# Altium PCB final_board.PcbDoc (part 2 of 2)
Units mm, origin at the board's own origin, x right, y up, seen from the top; angles counter-clockwise.
Board outline 39.12 x 41.3 mm, 2 copper layers (Top Layer, Bottom Layer); 55 components, 47 nets, 226 pads, 45 vias.
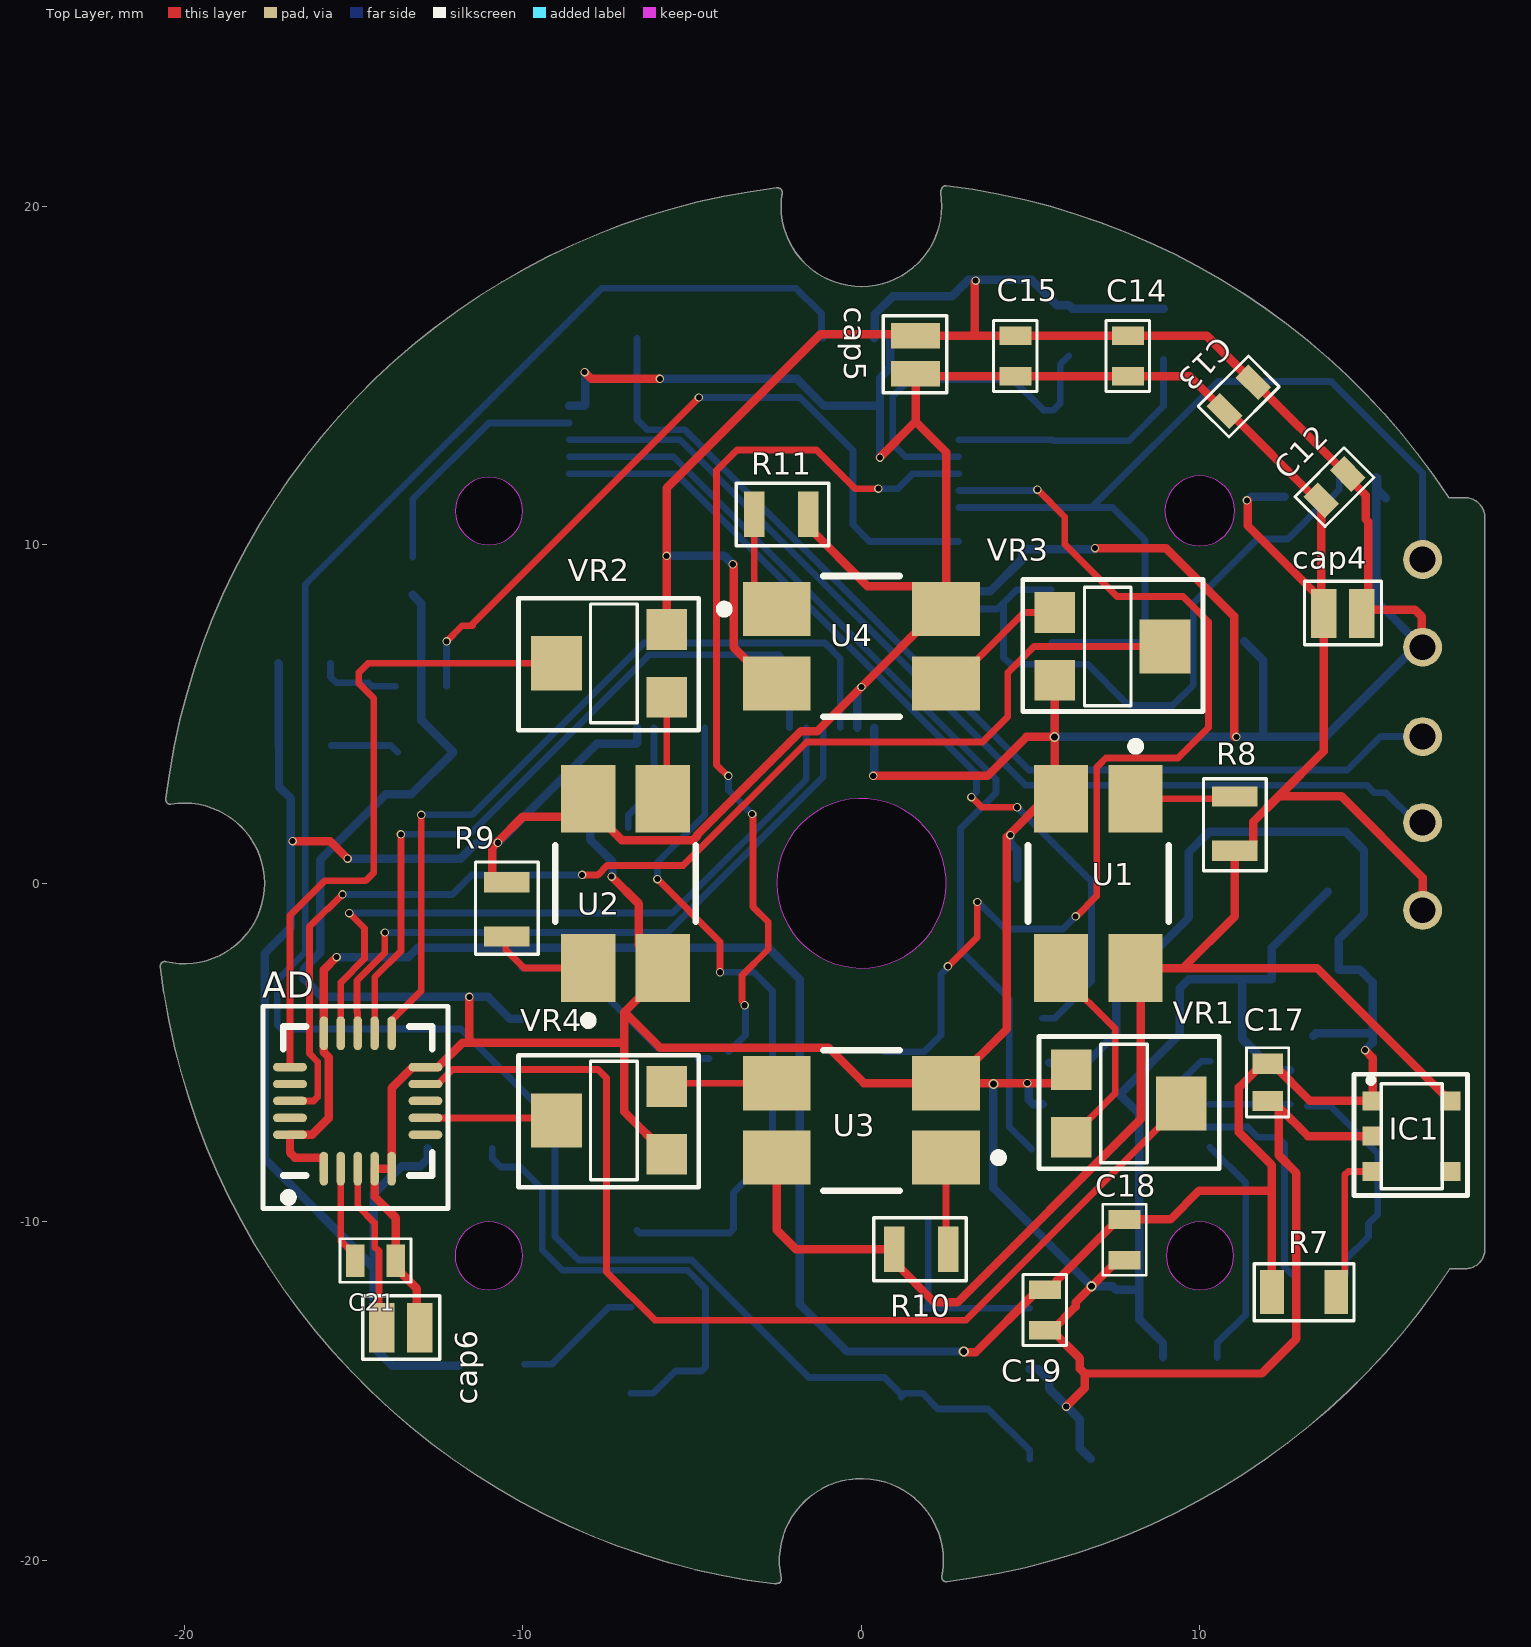
[diagram p0: Top Layer view]

## Via types
v1: diameter 0.25, hole 0.18, Top Layer to Bottom Layer, 41 vias
v2: diameter 0.3, hole 0.2, Top Layer to Bottom Layer, 4 vias

## Nets (pads, with @x,y where several pads share a name; then routed paths per layer and width w, separated by ;. In a path a pad name is that pad's centre, name@x,y a point inside that pad or via, vN(x,y) a via of type N, cw(c..) or ccw(c..) an arc to the next point about the centre after c; other vN are vias at no path point) (continued)
NetC7_2: (continued)
  Bottom Layer w0.2: stm.13 3.125,8.1 3.175,8.15 3.225,8.1 4.025,8.1 4.2,8.275 ; C7.2 4.6,8.675 4.2,8.275 ; cap1.1@14.113,11.975 14.113,11.625 13.838,11.35 13.771,11.35 12.596,10.175 L1.2 11.697,10.175 9.805,8.283 9.805,5.863 9.192,5.25 7.946,5.25 7.896,5.3 7.85,5.3 6.675,6.475 4.4,6.475 4.2,6.675 4.2,8.275
Netc10-3_1: cap3.1 stm.47 | length 7.3
  Bottom Layer w0.2: cap3.1@-13.25,9.637 -13.25,11.35 -11,13.6 stm.47
Netc-10-2_2: cap2.2 stm.31 | length 3.3
  Bottom Layer w0.2: cap2.2 -6.887,2 -6.145,2.742 -6.145,2.875 -6.125,2.895 stm.31
NetC_1: C.1 CR1.4 stm.4 | length 10.6
  Bottom Layer w0.2: stm.4 1.3,12.6 0.925,12.975 0.925,14.375 1.425,14.875 4.475,14.875 5.375,13.975 5.675,13.975 5.871,14.171 5.871,15.321 C.1
NetIC1_3: IC1.3 R7.2 | length 4.4
  Top Layer w0.2: R7.2 14.275,-11.812 14.275,-8.612 14.381,-8.506 IC1.3
NetLED1_1: LED1.1 R1.2 | length 2.4
  Bottom Layer w0.2: R1.2 -15.675,6.1 -15.5,5.925 -14.55,5.925 -14.45,5.825 LED1.1
NetLED2_1: LED2.1 R6.2 | length 2
  Bottom Layer w0.2: R6.2 -13.9,4.075 LED2.1
NetMC*_8: MC*.8 RS.1 | length 7
  Bottom Layer w0.2: MC*.8 11.354,-8.849 11.354,-12.729 10.508,-13.575 RS.1
NetR2_2: R2.2 S1.1 S1.2 | length 5.7
  Bottom Layer w0.2: S1.2@1.8,-12.515 1.835,-12.55 1.975,-12.55 R2.2 ; S1.2@1.975,-12.49 S1.1@1.975,-9.95
NetR3_1: R3.1 S1.5 | length 3.8
  Bottom Layer w0.2: R3.1 -9.14,-14.2 -7.455,-12.515 S1.5@-6.8,-12.515
NetR4_1: R4.1 S1.4 | length 14.1
  Bottom Layer w0.2: R4.1 -10.9,-8.125 -10.65,-8.375 -10.075,-8.375 -9.425,-9.025 -9.425,-10.825 -8.825,-11.425 -5.137,-11.425 -4.6,-11.962 -4.6,-14.283 -4.717,-14.4 -5.49,-14.4 -6.145,-15.055 S1.4@-6.8,-15.055
NetR8_2: R8.2 U1.A | length 3
  Top Layer w0.2: U1.A 10.962,2.5 R8.2
NetR9_2: R9.2 U2.A | length 3.3
  Top Layer w0.2: R9.2@-10.902,-1.567 -10.702,-1.567 -10.502,-1.767 -10.502,-1.967 -9.969,-2.5 U2.A@-8.1,-2.5
NetR10_2: R10.2 U3.A | length 2.7
  Top Layer w0.2: U3.A 2.5,-10.737 R10.2
NetR11_2: R11.2 U4.A | length 3.3
  Top Layer w0.2: R11.2 -3.167,8.767 U4.A U4.A@-2.367,8.233
NetU1_E: U1.E VR1.3 | length 6.2
  Top Layer w0.2: U1.E 5.9,-2.7 7.5,-4.3 7.5,-6.194 VR1.3
NetU2_E: U2.E VR2.1 | length 3.1
  Top Layer w0.2: U2.E@-5.9,2.5 -5.75,2.65 VR2.1
NetU3_E: U3.E VR4.3 | length 3.3
  Top Layer w0.2: VR4.3 -5.65,-5.9 U3.E
NetU4_E: U4.E VR3.1 | length 4.1
  Top Layer w0.2: U4.E 2.7,5.9 4.8,8 VR3.1
NRST: C1.2 H1.5 stm.7 sw1.3 | length 26.6
  Bottom Layer w0.2: stm.7 6.8,11.1 ; C1.2 8.275,7.125 sw1.3 8.375,7.225 8.375,10.142 7.417,11.1 6.8,11.1 ; H1.5 16.575,12.125 13.875,14.825 10.525,14.825 6.8,11.1
NSS: AD.11 stm.20 | length 23.5
  Top Layer w0.2: AD.11 -13.875,-4.05 -13,-3.175 v1(-13,2.025)
  Bottom Layer w0.2: v1(-13,2.025) -11.5,2.025 -6.425,7.1 -1.075,7.1 -0.625,6.65 stm.20
PB2: S1.6 stm.28 | length 20.8
  Top Layer w0.2: v1(-6.025,0.125) -4.175,-1.725 v1(-4.175,-2.625)
  Bottom Layer w0.2: S1.6@-6.625,-10.249 -6.549,-10.325 -3.892,-10.325 -3.775,-10.208 -3.775,-9.125 -2.625,-7.975 -2.625,-3.175 -3.175,-2.625 v1(-4.175,-2.625) ; v1(-6.025,0.125) -6.025,0.625 -4.625,2.025 stm.28
PC1: LED1.2 stm.9 | length 22.5
  Top Layer w0.2: v1(-12.25,7.15) -11.787,7.613 -11.487,7.613 -11.487,7.662 v1(-4.8,14.35)
  Bottom Layer w0.2: LED1.2 -12.25,7.125 v1@-12.225,7.15 ; v1@-4.775,14.35 -1.81,14.35 -0.25,12.79 -0.25,10.592 0.242,10.1 stm.9
PC13: stm.2
SCK: AD.13 stm.21 | length 19.6
  Top Layer w0.2: AD.13 -14.885,-4.415 -14.885,-3.815 -14.9,-3.8 -14.9,-2.872 -14.075,-2.047 v1(-14.075,-1.45)
  Bottom Layer w0.2: v1(-14.075,-1.45) -5.726,-1.45 -1.125,3.151 stm.21
SWCLK: H1.3 stm.49 | length 30.3
  Bottom Layer w0.2: stm.49 -6.625,13.7 -6.325,13.4 -5.226,13.4 2.199,5.975 2.321,5.975 4.946,3.35 14.35,3.35 15.335,4.335 H1.3
SWDIO: H1.2 stm.46 | length 29.6
  Bottom Layer w0.2: stm.46 -5.35,13.1 4.85,2.9 14.925,2.9 15.15,2.675 15.5,2.675 H1.2@16.35,1.825
VBAT: stm.1
pads on no net: AD.6 AD.8 AD.17 AD.19 CR1.2 CR1.3 IC1.4 MC*.5 stm.8 stm.10 stm.11 stm.14 stm.15 stm.16 stm.17 stm.24 stm.25 stm.26 stm.27 stm.29 stm.30 stm.33 stm.34 stm.35 stm.36 stm.37 stm.38 stm.39 stm.40 stm.41 stm.42 stm.43 stm.50 stm.51 stm.52 stm.53 stm.54 stm.55 stm.56 stm.57 stm.58 stm.59 stm.61 stm.62 sw1.2 sw1.4 sw2.S1 sw2.S2

## Polygon pours and split planes (outlines as drawn)
GND on Bottom Layer "Bottom Layer-GND 1" (solid, remove dead copper, pour order 248): 1.932,21.641 -1.473,21.641 ccw(c-1.473,2.032) -21.082,2.032 -21.082,-1.905 ccw(c-1.626,-1.905) -1.626,-21.361 3.434,-21.361 ccw(c3.434,-4.425) 20.371,-4.425 21.458,-4.425 ccw(c21.458,3.505) 29.388,3.505 29.388,7.899 ccw(c23.495,7.899) 23.495,13.792 ccw(c15.723,13.792) 15.723,21.565 1.626,21.565
no net on Bottom Layer "Bottom Layer-No Net 12" (solid, remove dead copper, pour order 264): 25.146,16.05
GND on Bottom Layer "Bottom Layer-GND" (solid, remove dead copper, pour order 250): 0.483,19.812
no net on Bottom Layer "Bottom Layer-No Net 11" (solid, remove dead copper, pour order 244): -7.442,22.25
no net on Bottom Layer "Bottom Layer-No Net 9" (solid, remove dead copper, pour order 232): -16.967,26.822
no net on Bottom Layer "Bottom Layer-No Net 10" (solid, pour order 216): 29.413,14.478
no net on Bottom Layer "Bottom Layer-No Net 7" (solid, pour order 194): -22.225,16.65
no net on Bottom Layer "Bottom Layer-No Net 8" (solid, pour order 104): -22.375,16.575
no net on Bottom Layer "Bottom Layer-No Net 4" (solid, pour order 102): -17.7,17.725
no net on Bottom Layer "Bottom Layer-No Net 5" (solid, pour order 100): -17.4,18.025
no net on Bottom Layer "Bottom Layer-No Net 6" (solid, pour order 92): -18.6,18.325
no net on Bottom Layer "Bottom Layer-No Net 3" (solid, pour order 90): -19.975,15.45
no net on Bottom Layer "Bottom Layer-No Net 1" (solid, pour order 88): -20.2,18.925
no net on Bottom Layer "Bottom Layer-No Net 2" (solid, pour order 68): -15.5,29.4
no net on Bottom Layer "Bottom Layer-No Net" (solid, pour order 62): -19.725,27.5
no net on Top Layer "Top Layer-No Net 9" (solid, pour order 198): -29.667,18.212
GND on Top Layer "Top Layer-GND" (solid, pour order 192): -0.2,20.6
GND on Top Layer "Top Layer-GND 1" (solid, pour order 190): -0.675,19.9
GND on Top Layer "Top Layer-GND 2" (solid, pour order 188): -27.2,19.125
GND on Top Layer "Top Layer-GND 3" (solid, pour order 182): -16.55,24.625
GND on Top Layer "Top Layer-GND 4" (solid, pour order 180): -2.625,20.45
GND on Top Layer "Top Layer-GND 5" (solid, pour order 176): -3.15,18.825
GND on Top Layer "Top Layer-GND 6" (solid, pour order 174): -3.15,18.825
GND on Top Layer "Top Layer-GND 7" (solid, pour order 168): 0.01,20.05
GND on Top Layer "Top Layer-GND 8" (solid, pour order 166): -26.775,10.575
GND on Top Layer "Top Layer-GND 9" (solid, pour order 156): -11.075,19.9
GND on Top Layer "Top Layer-GND 10" (solid, pour order 140): 47.45,12.2 47.575,12.2 cw(c47.575,12.1) 47.675,12.1
GND on Top Layer "Top Layer-GND 11" (solid, pour order 138): 47,11.275
GND on Top Layer "Top Layer-GND 12" (solid, pour order 134): -5.75,9.675
no net on Top Layer "Top Layer-No Net 6" (solid, pour order 96): -21.55,22.9
no net on Top Layer "Top Layer-No Net 3" (solid, pour order 84): -19.175,19.3
no net on Top Layer "Top Layer-No Net 4" (solid, pour order 82): -18.825,19.6
no net on Top Layer "Top Layer-No Net 5" (solid, pour order 80): -18.825,19.6
no net on Top Layer "Top Layer-No Net 7" (solid, pour order 76): -13.425,19.925
no net on Top Layer "Top Layer-No Net 8" (solid, pour order 74): -13.425,19.925
no net on Top Layer "Top Layer-No Net" (solid, pour order 28): -18.625,20.45
no net on Top Layer "Top Layer-No Net 1" (solid, pour order 24): -20.825,23.975
no net on Top Layer "Top Layer-No Net 2" (solid, pour order 20): -19.625,17.9

## Other copper
Top Layer:
  pour cut-out: -22.9,24.2

## Silkscreen, mask and mechanical layers (free items; w line width, h text height)
Bottom Overlay:
  text "NRST" at 15.443,9.425 h0.45
  text "GND" at 15.392,6.68 h0.45
  text "SWCLK" at 15.545,4.064 h0.45
  text "SWDIO" at 15.494,1.575 h0.45
  text "3.3V" at 15.469,-1.346 h0.45
Mechanical 1:
  circle w0.254: c9.997,11 r1.032
  circle w0.254: c10,-11 r1
  circle w0.254: c-11,-11 r1
  circle w0.254: c-11,10.997 r0.997
  lines w0.254: -20.578,-2.447 ccw(c0,0) -2.562,-20.564 ; -20.575,-2.433 ccw(c-20,0) -20.413,2.466 ; -20.417,2.49 cw(c0,0) -2.493,20.417 ; -2.49,-20.548 cw(c0,-20) 2.503,-20.485 ; -2.466,20.412 ccw(c0,20) 2.465,20.418 ; 2.495,20.479 cw(c0,0) 17.282,11.267 17.82,11.267 cw(c17.82,10.8) 18.287,10.8 18.287,-10.805 cw(c17.839,-10.805) 17.839,-11.253 17.31,-11.253 ; 2.505,-20.497 ccw(c0,0) 17.314,-11.253 ; 2.505,-0.016 cw(c0.018,-0.012) 2.505,-0.007